# EAGLE board step-att-enclosure (EAGLE 5.07)

Size 90 x 36 mm. Coordinates in mm from the lower left corner, seen from the top.
Outline: 0,0 90,0 90,36 0,36 0,0
Copper layers (1*16): Top 0.035mm / dielectric 1.5mm / Bottom 0.035mm
Design rules "default": minimum track width 10mil, minimum drill 24mil, track to track 8mil, track to pad 8mil, pad to pad 8mil, via to via 8mil, smd to smd 8mil, copper to edge 40mil, drill to drill 8mil, minimum pad ring 10mil, minimum via ring 8mil, stop-mask expansion 4mil, vias tented up to drill 0mil, thermal gap 10mil

## Footprints (pad centres in the part's own frame; a part is rotated, then mirrored left to right if it is on the bottom)
3,0 = hole 3: 0,0

## Placement (x,y rotation side)
S1  MOUNT-HOLE3.0  [3,0]  52.25,19 0 top
S2  MOUNT-HOLE3.0  [3,0]  66.25,19 0 top
S3  MOUNT-HOLE3.0  [3,0]  37.75,19 0 top
S4  MOUNT-HOLE3.0  [3,0]  23.75,19 0 top

## Library data of the parts
S1-S4 = holes